# EAGLE board rcio_v2 (EAGLE 9.6.2)
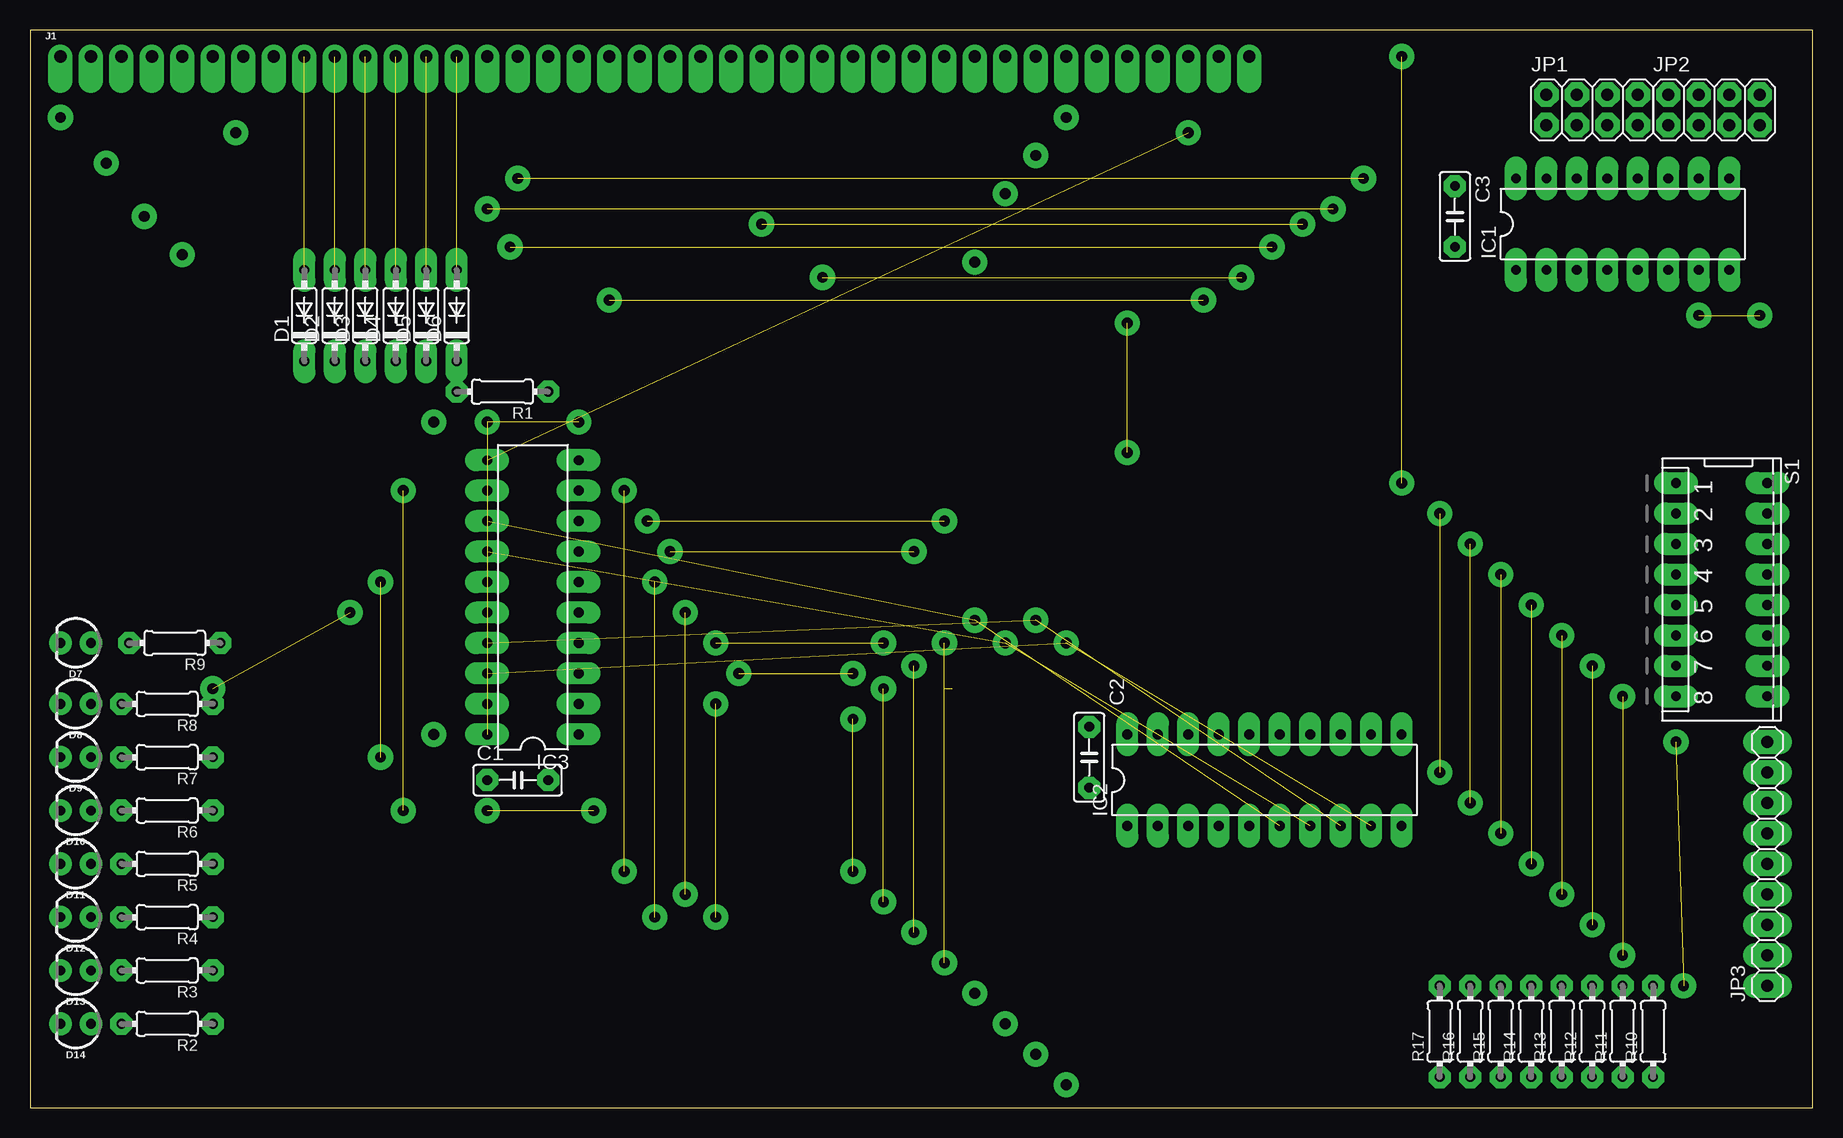
[diagram p0: board, top side]
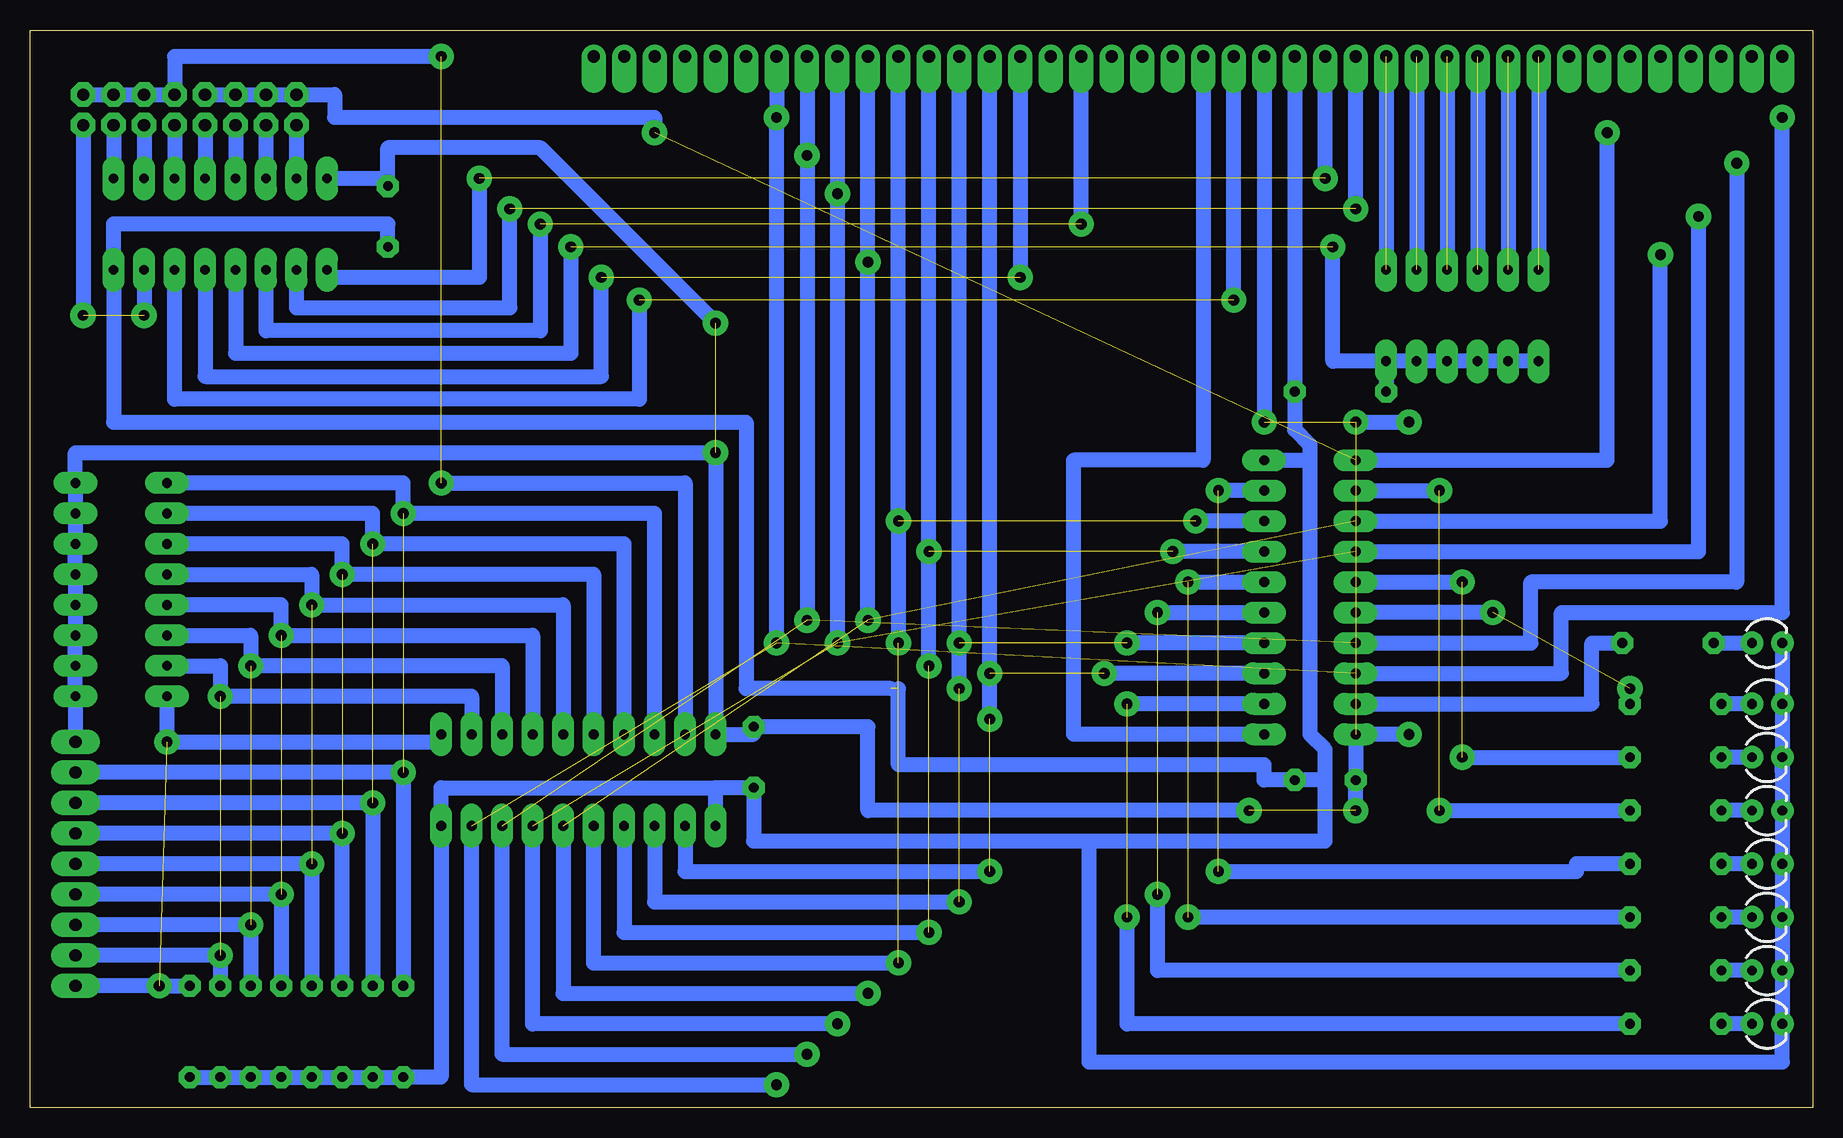
[diagram p1: board, bottom side, seen from below]

Size 148.57 x 89.84 mm. Coordinates in mm from the lower left corner, seen from the top.
Outline: 0,0 148.57,0 148.57,89.84 0,89.84 0,0
Copper layers (1*16): Top 0.035mm / dielectric 1.5mm / Bottom 0.035mm
Design rules "LabE": minimum track width 50mil, minimum drill 0.8mm, track to track 16mil, track to pad 16mil, pad to pad 16mil, via to via 16mil, smd to smd 16mil, copper to edge 0mil, drill to drill 16mil, minimum pad ring 20mil, minimum via ring 20mil, stop-mask expansion 4mil, vias tented up to drill 0mil, thermal gap 10mil

## Footprints (pad centres in the part's own frame; a part is rotated, then mirrored left to right if it is on the bottom)
C050-025X075 = drill 0.813 octagon: 1 -2.54,0; 2 2.54,0
DO35-7 = drill 0.813 long: A 3.81,0; C -3.81,0
LED_3MM = drill 0.813 pad 1.88: A -1.27,0; K 1.27,0
DIL16 = drill 0.813 long: 1 -8.89,-3.81; 2 -6.35,-3.81; 3 -3.81,-3.81; 4 -1.27,-3.81; 5 1.27,-3.81; 6 3.81,-3.81; 7 6.35,-3.81; 8 8.89,-3.81; 9 8.89,3.81; 10 6.35,3.81; 11 3.81,3.81; 12 1.27,3.81; 13 -1.27,3.81; 14 -3.81,3.81; 15 -6.35,3.81; 16 -8.89,3.81
DIL20 = drill 0.813 long: 1 -11.43,-3.81; 2 -8.89,-3.81; 3 -6.35,-3.81; 4 -3.81,-3.81; 5 -1.27,-3.81; 6 1.27,-3.81; 7 3.81,-3.81; 8 6.35,-3.81; 9 8.89,-3.81; 10 11.43,-3.81; 11 11.43,3.81; 12 8.89,3.81; 13 6.35,3.81; 14 3.81,3.81; 15 1.27,3.81; 16 -1.27,3.81; 17 -3.81,3.81; 18 -6.35,3.81; 19 -8.89,3.81; 20 -11.43,3.81
1X40_OFFSET = drill 1.016 pad 1.88 offset: 1 0,0; 2 2.54,0; 3 5.08,0; 4 7.62,0; 5 10.16,0; 6 12.7,0; 7 15.24,0; 8 17.78,0; 9 20.32,0; 10 22.86,0; 11 25.4,0; 12 27.94,0; 13 30.48,0; 14 33.02,0; 15 35.56,0; 16 38.1,0; 17 40.64,0; 18 43.18,0; 19 45.72,0; 20 48.26,0; 21 50.8,0; 22 53.34,0; 23 55.88,0; 24 58.42,0; 25 60.96,0; 26 63.5,0; 27 66.04,0; 28 68.58,0; 29 71.12,0; 30 73.66,0; 31 76.2,0; 32 78.74,0; 33 81.28,0; 34 83.82,0; 35 86.36,0; 36 88.9,0; 37 91.44,0; 38 93.98,0; 39 96.52,0; 40 99.06,0
2X04 = drill 1.016 octagon: 1 -3.81,-1.27; 2 -3.81,1.27; 3 -1.27,-1.27; 4 -1.27,1.27; 5 1.27,-1.27; 6 1.27,1.27; 7 3.81,-1.27; 8 3.81,1.27
1X09 = drill 1.016 long: 1 -10.16,0; 2 -7.62,0; 3 -5.08,0; 4 -2.54,0; 5 0,0; 6 2.54,0; 7 5.08,0; 8 7.62,0; 9 10.16,0
0204/7 = drill 0.813 octagon: 1 -3.81,0; 2 3.81,0
DP-08 = drill 0.813 long: 1 -8.89,-3.81; 2 -6.35,-3.81; 3 -3.81,-3.81; 4 -1.27,-3.81; 5 1.27,-3.81; 6 3.81,-3.81; 7 6.35,-3.81; 8 8.89,-3.81; 9 8.89,3.81; 10 6.35,3.81; 11 3.81,3.81; 12 1.27,3.81; 13 -1.27,3.81; 14 -3.81,3.81; 15 -6.35,3.81; 16 -8.89,3.81

## Placement (x,y rotation side)
C1  [C050-025X075]  40.64,27.3 0 top
C2  [C050-025X075]  88.27,29.21 270 top
C3  [C050-025X075]  118.75,74.3 270 top
D1  1N4148DO35-7  [DO35-7]  22.86,66.04 90 top
D2  1N4148DO35-7  [DO35-7]  25.4,66.04 90 top
D3  1N4148DO35-7  [DO35-7]  27.94,66.04 90 top
D4  1N4148DO35-7  [DO35-7]  30.48,66.04 90 top
D5  1N4148DO35-7  [DO35-7]  33.02,66.04 90 top
D6  1N4148DO35-7  [DO35-7]  35.56,66.04 90 top
D7  [LED_3MM]  3.81,38.73 180 top
D8  [LED_3MM]  3.81,33.66 180 top
D9  [LED_3MM]  3.81,29.21 180 top
D10  [LED_3MM]  3.81,24.77 180 top
D11  [LED_3MM]  3.81,20.32 180 top
D12  [LED_3MM]  3.81,15.88 180 top
D13  [LED_3MM]  3.81,11.43 180 top
D14  [LED_3MM]  3.81,6.99 180 top
IC1  74LS138N  [DIL16]  132.72,73.66 0 top
IC2  74LS245N  [DIL20]  102.87,27.3 0 top
IC3  74HCT273N  [DIL20]  41.91,42.55 90 top
J1  [1X40_OFFSET]  2.54,87.63 0 top
JP1  [2X04]  130.18,83.19 0 top
JP2  [2X04]  140.34,83.19 0 top
JP3  [1X09]  144.78,20.32 90 top
R1  [0204/7]  39.37,59.69 180 top
R2  [0204/7]  11.43,6.99 180 top
R3  [0204/7]  11.43,11.43 180 top
R4  [0204/7]  11.43,15.88 180 top
R5  [0204/7]  11.43,20.32 180 top
R6  [0204/7]  11.43,24.77 180 top
R7  [0204/7]  11.43,29.21 180 top
R8  [0204/7]  11.43,33.66 180 top
R9  [0204/7]  12.06,38.73 180 top
R10  2.2K  [0204/7]  135.25,6.35 90 top
R11  2.2k  [0204/7]  132.72,6.35 90 top
R12  [0204/7]  130.18,6.35 90 top
R13  2.2k  [0204/7]  127.64,6.35 90 top
R14  [0204/7]  125.09,6.35 90 top
R15  2.2k  [0204/7]  122.56,6.35 90 top
R16  2.2k  [0204/7]  120.02,6.35 90 top
R17  2.2k  [0204/7]  117.47,6.35 90 top
S1  [DP-08]  140.97,43.18 270 top

## Library data of the parts
C1 = rcl; SPICEPREFIX: C
C2 C3 = LabE; SPICEPREFIX: C
D1-D6 = diode
D7-D14 = SparkFun-LED; PROD_ID: DIO-08794
IC1-IC3 = 74xx-eu
J1 = SparkFun-Connectors
JP1-JP3 = pinhead
R1-R17 = rcl; SPICEPREFIX: R
S1 = switch-dil; MPN: DP08; OC_FARNELL: 9471626; OC_NEWARK: 73J0035

## Nets
A0: IC1.1 J1.16
A1: IC1.2 J1.15
A2: D6.A J1.14
A3: D5.A J1.13
A4: D4.A J1.12
A5: D3.A J1.11
A6: D2.A J1.10
A7: D1.A J1.9
A8: J1.8
A9: J1.7
A10: J1.6
A11: J1.5
A12: J1.4
A13: J1.3
A14: J1.2
A15: J1.1
AX_LINES: D1.C D2.C D3.C D4.C D5.C D6.C IC1.4 R1.2
CLK: J1.21
D0: IC2.2 IC3.3 J1.27
D1: IC2.3 IC3.4 J1.28
D2: IC2.4 IC3.7 J1.29
D3: IC2.5 IC3.8 J1.30
D4: IC2.6 IC3.13 J1.31
D5: IC2.7 IC3.14 J1.32
D6: IC2.8 IC3.17 J1.33
D7: IC2.9 IC3.18 J1.34
GND: C1.2 C2.2 C3.2 D7.K D8.K D9.K D10.K D11.K D12.K D13.K D14.K IC1.8 IC2.1 IC2.10 IC3.10 J1.17 R1.1 R10.1 R11.1 R12.1 R13.1 R14.1 R15.1 R16.1 R17.1
IN0: IC2.18 JP3.8 R17.2 S1.1
IN1: IC2.17 JP3.7 R16.2 S1.2
IN2: IC2.16 JP3.6 R15.2 S1.3
IN3: IC2.15 JP3.5 R14.2 S1.4
IN4: IC2.14 JP3.4 R13.2 S1.5
IN5: IC2.13 JP3.3 R12.2 S1.6
IN6: IC2.12 JP3.2 R11.2 S1.7
IN7: IC2.11 JP3.1 R10.2 S1.8
INT_L: J1.22
IOREQ_L: IC1.5 J1.26
L0: IC3.2 R2.1
L1: IC3.5 R3.1
L2: IC3.6 R4.1
L3: IC3.9 R5.1
L4: IC3.12 R6.1
L5: IC3.15 R7.1
L6: IC3.16 R8.1
L7: IC3.19 R9.1
LED7: D7.A R9.2
LS245_E_L: IC2.19 JP2.2 JP2.4 JP2.6 JP2.8
LS273_CLK: IC3.11 JP1.2 JP1.4 JP1.6 JP1.8
M1_L: IC1.6 J1.19
MREQ_L: J1.23
N$1: J1.37
N$2: J1.38
N$3: J1.39
N$4: IC1.15 JP1.1
N$5: IC1.14 JP1.3
N$6: IC1.13 JP1.5
N$7: IC1.12 JP1.7
N$8: IC1.11 JP2.1
N$9: IC1.10 JP2.3
N$10: IC1.9 JP2.5
N$13: J1.40
N$23: D14.A R2.2
N$24: D13.A R3.2
N$25: D12.A R4.2
N$26: D11.A R5.2
N$27: D10.A R6.2
N$28: D9.A R7.2
N$29: D8.A R8.2
P7T7: IC1.7 JP2.7
RD_L: J1.25
RESET_L: IC3.1 J1.20
RX: J1.36
TX: J1.35
VCC: C1.1 C2.1 C3.1 IC1.16 IC2.20 IC3.20 J1.18 JP3.9 S1.9 S1.10 S1.11 S1.12 S1.13 S1.14 S1.15 S1.16
WR_L: IC1.3 J1.24

## Tracks (layer width: path | path; a pad name or v marks a point on that pad's centre or on a via)
A0  (via drill 0.9 pad 2.1)  (1 unrouted)
  Bottom 1.27: IC1.1 123.19,69.22 111.12,69.22 v111.12,77.47 | v40.64,77.47 J1.16
A1  (via drill 0.9 pad 2.1)  (1 unrouted)
  Bottom 1.27: IC1.2 126.36,66.67 108.58,66.67 v108.58,74.93 | v38.1,74.93 J1.15
A2  (1 unrouted)
  Bottom 1.27: J1.14 D6.A
A3  (1 unrouted)
  Bottom 1.27: J1.13 D5.A
A4  (1 unrouted)
  Bottom 1.27: J1.12 D4.A
A5  (1 unrouted)
  Bottom 1.27: J1.11 D3.A
A6  (1 unrouted)
  Bottom 1.27: J1.10 D2.A
A7  (1 unrouted)
  Bottom 1.27: J1.9 D1.A
AX_LINES  (via drill 0.9 pad 2.1)  (1 unrouted)
  Bottom 1.27: D6.C R1.2 | D1.C D2.C D3.C D4.C D5.C D6.C | IC1.4 131.44,62.87 103.5,62.87 v103.5,71.75 | D6.C 40.01,62.23 v40.01,71.75
D0  (via drill 0.9 pad 2.1)  (2 unrouted)
  Bottom 1.27: IC2.2 93.98,19.68 v68.58,19.68 | J1.27 v68.58,36.2 v68.58,32.38 | IC3.3 v59.05,36.2
D1  (via drill 0.9 pad 2.1)  (2 unrouted)
  Bottom 1.27: IC2.3 96.52,17.14 v71.12,17.14 | J1.28 v71.12,38.73 v71.12,34.92 | IC3.4 v57.15,38.73
D2  (via drill 0.9 pad 2.1)  (2 unrouted)
  Bottom 1.27: IC2.4 99.06,14.61 v73.66,14.61 | IC3.7 v53.34,46.35 | J1.29 v73.66,46.35 v73.66,36.83
D3  (via drill 0.9 pad 2.1)  (2 unrouted)
  Bottom 1.27: IC2.5 101.6,12.06 v76.2,12.06 | IC3.8 v51.44,48.9 | J1.30 v76.2,48.9 v76.2,38.73
D4  (via drill 0.9 pad 2.1)  (2 unrouted)
  Bottom 1.27: IC3.13 12.7,48.9 v12.7,71.12 | J1.31 v78.74,70.48 v78.74,40.64 | IC2.6 104.14,9.53 v78.74,9.53
D5  (via drill 0.9 pad 2.1)  (2 unrouted)
  Bottom 1.27: IC2.7 106.68,6.99 v81.28,6.99 | IC3.14 9.53,46.35 v9.53,74.3 | J1.32 v81.28,76.2 v81.28,38.73
D6  (via drill 0.9 pad 2.1)  (2 unrouted)
  Bottom 1.27: IC2.8 109.22,4.45 v83.82,4.45 | J1.33 v83.82,79.38 v83.82,40.64 | v6.35,78.74 6.35,43.81 23.5,43.81 23.5,38.73 IC3.17
D7  (via drill 0.9 pad 2.1)  (2 unrouted)
  Bottom 1.27: IC2.9 111.76,1.91 v86.36,1.91 | v2.54,82.55 2.54,41.27 20.95,41.27 20.95,36.2 IC3.18 | J1.34 v86.36,82.55 v86.36,38.73
GND  (1 unrouted)
  Bottom 1.27: J1.17 R1.1 43.18,56.52 41.91,55.24 41.91,53.98 | R10.1 R11.1 R12.1 R13.1 R14.1 R15.1 R16.1 R17.1 114.3,2.54 IC2.10 114.3,26.67 91.44,26.67 | IC2.1 91.44,26.67 | 41.91,53.98 41.91,31.11 40.64,29.84 40.64,27.3 | 60.33,22.23 88.27,22.23 C2.2 91.44,26.67 | 60.33,22.23 40.64,22.23 40.64,27.3 | 40.64,27.3 C1.2 45.72,27.3 45.72,28.57 76.2,28.57 76.2,34.92 | IC3.10 41.91,53.98 | C3.2 118.75,73.66 141.6,73.66 IC1.8 141.6,57.15 88.9,57.15 88.9,34.92 76.83,34.92 | D7.K D8.K D9.K | 2.54,27.94 D9.K | D9.K D10.K D11.K D12.K D13.K D14.K 2.54,3.81 60.33,3.81 60.33,22.23
IN0  (via drill 0.9 pad 2.1)  (1 unrouted)
  Bottom 1.27: IC2.18 96.52,49.53 v117.47,49.53 117.47,52.07 S1.1 | R17.2 v117.47,27.94 JP3.8
IN1  (via drill 0.9 pad 2.1)  (1 unrouted)
  Bottom 1.27: JP3.7 v120.02,25.4 R16.2 | S1.2 120.02,49.53 v120.02,46.99 99.06,46.99 IC2.17
IN2  (via drill 0.9 pad 2.1)  (1 unrouted)
  Bottom 1.27: IC2.16 101.6,44.45 v122.56,44.45 122.56,46.99 S1.3 | JP3.6 v122.56,22.86 R15.2
IN3  (via drill 0.9 pad 2.1)  (1 unrouted)
  Bottom 1.27: JP3.5 v125.09,20.32 R14.2 | S1.4 125.09,44.45 v125.09,41.91 104.14,41.91 IC2.15
IN4  (via drill 0.9 pad 2.1)  (1 unrouted)
  Bottom 1.27: IC2.14 106.68,39.37 v127.64,39.37 127.64,41.91 S1.5 | JP3.4 v127.64,17.78 R13.2
IN5  (via drill 0.9 pad 2.1)  (1 unrouted)
  Bottom 1.27: JP3.3 v130.18,15.24 R12.2 | IC2.13 109.22,36.83 v130.18,36.83 130.18,39.37 S1.6
IN6  (via drill 0.9 pad 2.1)  (1 unrouted)
  Bottom 1.27: IC2.12 111.76,34.29 v132.72,34.29 132.72,36.83 S1.7 | JP3.2 v132.72,12.7 R11.2
IN7  (via drill 0.9 pad 2.1)  (1 unrouted)
  Bottom 1.27: JP3.1 v137.79,10.16 R10.2 | S1.8 v137.16,30.48 114.94,30.48 IC2.11
IOREQ_L  (via drill 0.9 pad 2.1)  (1 unrouted)
  Bottom 1.27: J1.26 v66.04,69.22 | IC1.5 133.99,60.96 100.97,60.96 v100.97,69.22
L0  (via drill 0.9 pad 2.1)  (1 unrouted)
  Bottom 1.27: IC3.2 v57.15,33.66 | R2.1 57.15,6.99 v57.15,15.88
L1  (via drill 0.9 pad 2.1)  (1 unrouted)
  Bottom 1.27: v54.61,41.27 IC3.5 | R3.1 54.61,11.43 v54.61,17.78
L2  (via drill 0.9 pad 2.1)  (1 unrouted)
  Bottom 1.27: v52.07,43.81 IC3.6 | R4.1 v52.07,15.88
L3  (via drill 0.9 pad 2.1)  (1 unrouted)
  Bottom 1.27: IC3.9 v49.53,51.44 | R5.1 19.68,20.32 19.68,19.68 v49.53,19.68
L4  (via drill 0.9 pad 2.1)  (1 unrouted)
  Bottom 1.27: IC3.12 v31.11,51.44 | v31.11,24.77 R6.1
L5  (via drill 0.9 pad 2.1)  (1 unrouted)
  Bottom 1.27: IC3.15 v29.21,43.81 | v29.21,29.21 R7.1
L6  (via drill 0.9 pad 2.1)  (1 unrouted)
  Bottom 1.27: v26.67,41.27 IC3.16 | R8.1 v15.24,34.92
L7
  Bottom 1.27: IC3.19 18.41,33.66 18.41,38.73 R9.1
LED7
  Bottom 1.27: R9.2 D7.A
LS245_E_L  (via drill 0.9 pad 2.1)  (1 unrouted)
  Bottom 1.27: JP2.8 JP2.6 JP2.4 JP2.2 136.53,87.63 v114.3,87.63 | v114.3,52.07 93.98,52.07 IC2.19
LS273_CLK  (via drill 0.9 pad 2.1)  (1 unrouted)
  Bottom 1.27: JP1.8 JP1.6 JP1.4 JP1.2 123.19,84.45 123.19,82.55 96.52,82.55 v96.52,81.28 | IC3.11 17.14,53.98 v17.14,81.28
M1_L  (via drill 0.9 pad 2.1)  (1 unrouted)
  Bottom 1.27: v48.26,67.31 J1.19 | v97.79,67.31 97.79,59.05 136.53,59.05 IC1.6
N$4
  Bottom 1.27: JP1.1 IC1.15
N$5
  Bottom 1.27: JP1.3 IC1.14
N$6
  Bottom 1.27: JP1.5 IC1.13
N$7
  Bottom 1.27: JP1.7 IC1.12
N$8
  Bottom 1.27: JP2.1 IC1.11
N$9
  Bottom 1.27: JP2.3 IC1.10
N$10
  Bottom 1.27: JP2.5 IC1.9
N$23
  Bottom 1.27: D14.A R2.2
N$24
  Bottom 1.27: D13.A R3.2
N$25
  Bottom 1.27: D12.A R4.2
N$26
  Bottom 1.27: D11.A R5.2
N$27
  Bottom 1.27: D10.A R6.2
N$28
  Bottom 1.27: D9.A R7.2
N$29
  Bottom 1.27: D8.A R8.2
P7T7  (via drill 0.9 pad 2.1)  (1 unrouted)
  Bottom 1.27: JP2.7 v144.15,66.04 | IC1.7 v139.06,66.04
RESET_L
  Bottom 1.27: J1.20 50.8,53.98 61.59,53.98 61.59,31.11 IC3.1
VCC  (via drill 0.9 pad 2.1)  (4 unrouted)
  Bottom 1.27: IC1.16 119.38,77.47 C3.1 118.75,80.01 106.05,80.01 v91.44,65.41 | JP3.9 S1.9 S1.10 S1.11 S1.12 S1.13 S1.14 S1.15 S1.16 144.78,54.61 v91.44,54.61 IC2.20 88.27,31.11 C2.1 78.74,31.75 78.74,24.77 v46.99,24.77 | J1.18 v45.72,57.15 | v33.66,31.11 IC3.20 C1.1 v38.1,24.77 | v38.1,57.15 v33.66,57.15
WR_L  (via drill 0.9 pad 2.1)  (1 unrouted)
  Bottom 1.27: IC1.3 128.91,64.77 106.05,64.77 v106.05,73.66 | v60.96,73.66 J1.24